# Altium PCB VCO.PcbDoc (part 1 of 2)
Units mm, origin at the board's own origin, x right, y up, seen from the top; angles counter-clockwise.
Board outline 69 x 110 mm, 2 copper layers (Top Layer, Bottom Layer); 139 components, 108 nets, 464 pads, 459 vias.
Unrouted connection lines stored in the file: 58.
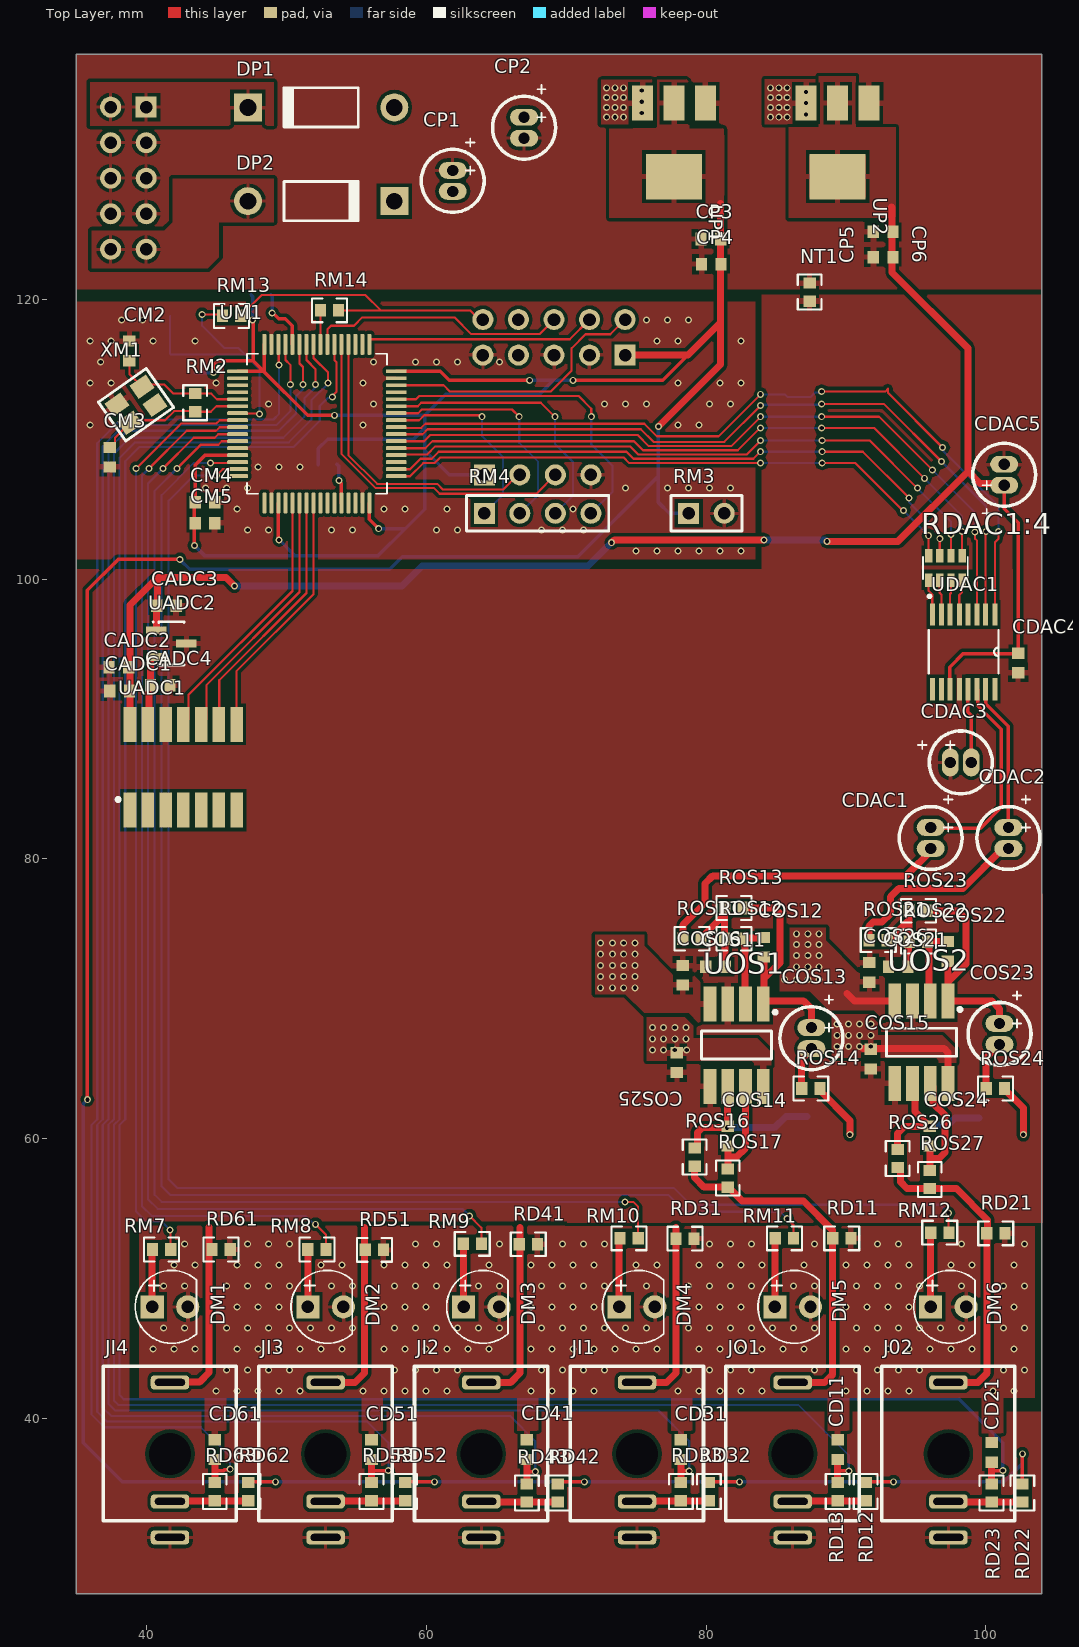
[diagram p0: Top Layer view]
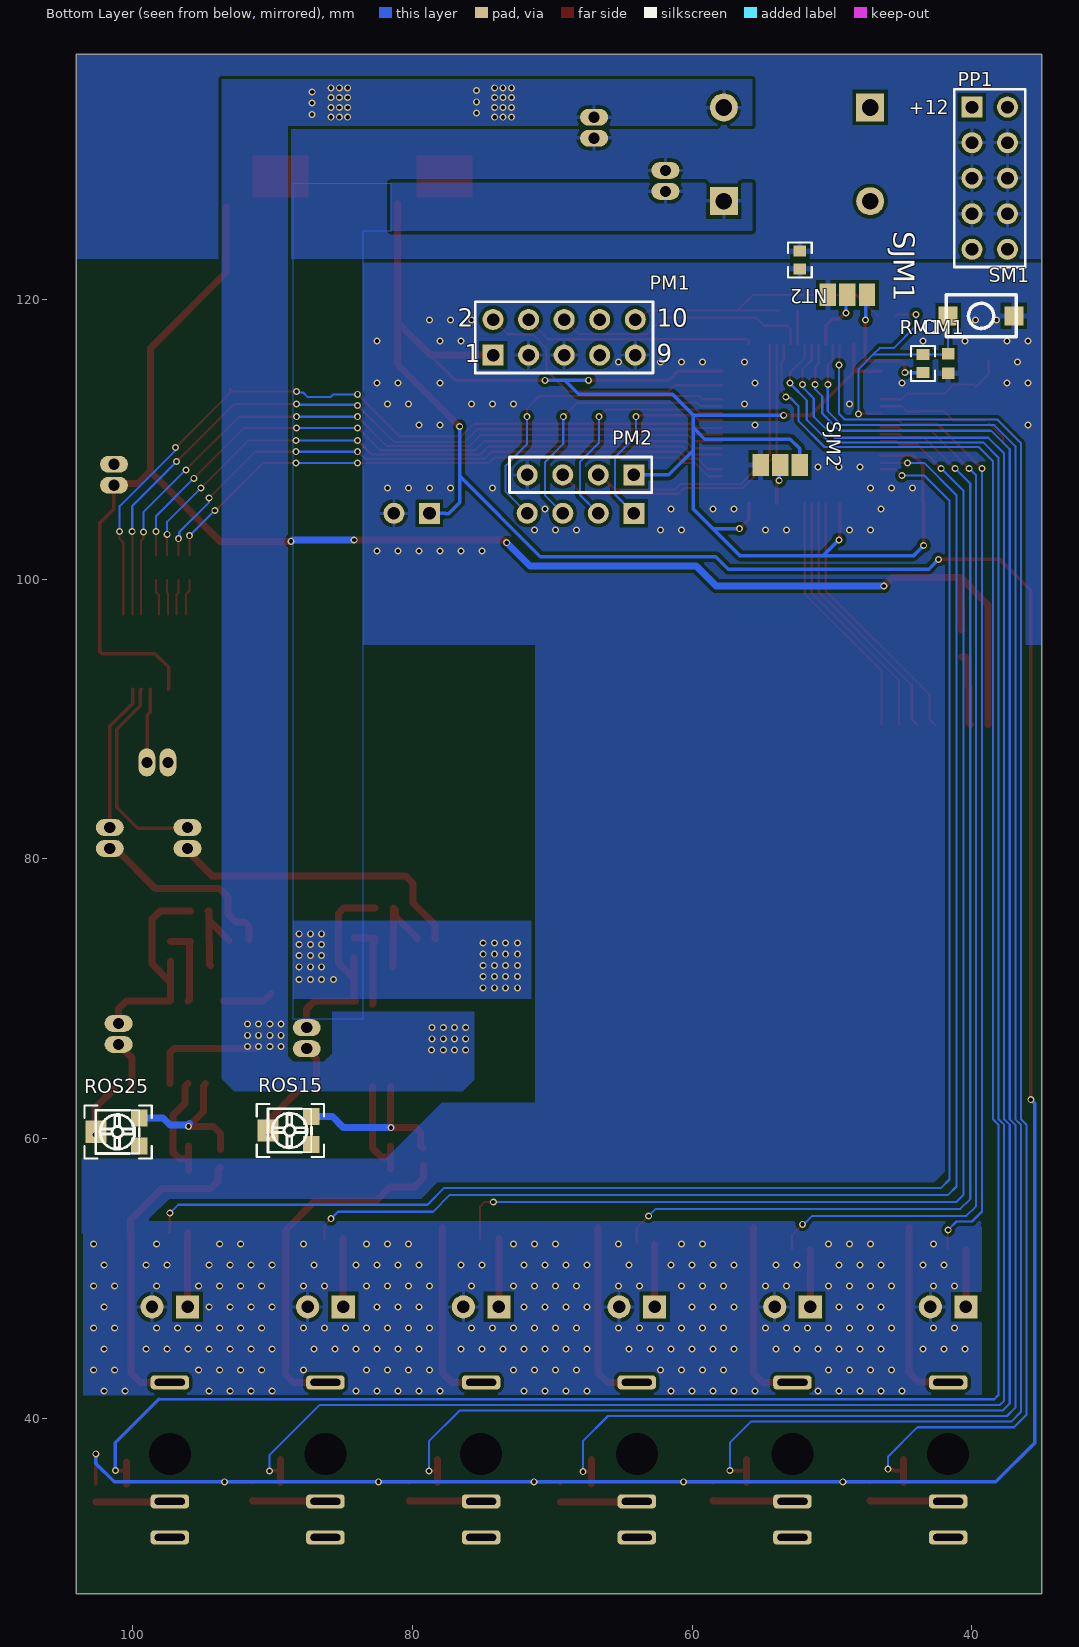
[diagram p1: Bottom Layer view, seen from below]

## Layer stack, top to bottom
Top Solder: solder mask 0.0102, Solder Resist, Dk 3.5
Top Layer: signal copper 0.0356
Dielectric 1: dielectric 0.32, FR-4, Dk 4.8
Bottom Layer: signal copper 0.0356
Bottom Solder: solder mask 0.0102, Solder Resist, Dk 3.5

## Board outline
35,27.5 104,27.5 104,137.5 35,137.5

## Design rules (kind name [scope] priority, off if disabled: settings)
Clearance Clearance_1 [InPolygon] p1: gap=0.25 ignorepadtopadclearanceinfootprint=FALSE
Clearance [All] p2: gap=0.01 ignorepadtopadclearanceinfootprint=FALSE
ComponentClearance [All] p1: gap=0 collisioncheckmode=3 verticalgap=0.254 showdistances=FALSE
PlaneConnect [All] p1: planeconnectstyle=Relief reliefexpansion=0.508 reliefentries=4 reliefconductorwidth=0.5 reliefairgap=0.125
PolygonConnect PolygonConnect_1 [All] p1: thpad.connectstyle=Relief thpad.reliefconductorwidth=0.254 thpad.reliefentries=4 thpad.polygonreliefangle="90 Angle" thpad.airgapwidth=0.254 smdpad.connectstyle=Relief smdpad.reliefconductorwidth=0.4 smdpad.reliefentries=4 smdpad.polygonreliefangle="90 Angle" smdpad.airgapwidth=0.254 via.connectstyle=Direct via.reliefconductorwidth=0.254 via.reliefentries=4 via.polygonreliefangle="90 Angle" via.airgapwidth=0.254
RoutingVias [All] p1: holewidth=0.711 width=1.27 viastyle="Through Hole" minholewidth=0.3 minwidth=0.5 maxholewidth=0.711 maxwidth=1.27
SolderMaskExpansion [All] p1: expansion=0.102
Width [All] p1: maxlimit=5 minlimit=0.152 preferedwidth=0.254
28 further rules are at their usual default settings.

## Classes and differential pairs
component class VCO_TOP: NT1 NT2
component class U_Power: CP1 CP2 CP3 CP4 CP5 CP6 DP1 DP2 PP1 UP1 UP2
component class U_Micro: CM1 CM2 CM3 CM4 CM5 DM1 DM2 DM3 DM4 DM5 DM6 PM1 PM2 RM1 RM2 RM3 RM4 RM7 RM8 RM9 RM10 RM11 RM12 RM13 RM14 SJM1 SJM2 SM1 UM1 XM1
component class U_Interfaces: CD11 CD21 CD31 CD41 CD51 CD61 J02 JI1 JI2 JI3 JI4 JO1 RD11 RD12 RD13 RD21 RD22 RD23 RD31 RD32 RD33 RD41 RD42 RD43 RD51 RD52 RD53 RD61 RD62 RD63
component class U_Input_stages: * *? CIS11 CIS21 CIS31 CIS32 CIS33 RIS11 RIS12 RIS13 RIS14 RIS21 RIS22 RIS23 RIS24 RIS31 RIS32 RIS33 RIS34 RIS35 RIS36 RIS41 RIS42 RIS43
component class U_DAC: CDAC1 CDAC2 CDAC3 CDAC4 CDAC5 RDAC1:4 UDAC1
component class U_ADC: CADC1 CADC2 CADC3 CADC4 UADC1 UADC2
component class U_Output_stages: COS11 COS12 COS13 COS14 COS15 COS16 COS21 COS22 COS23 COS24 COS25 COS26 ROS11 ROS12 ROS13 ROS14 ROS15 ROS16 ROS17 ROS21 ROS22 ROS23 ROS24 ROS25 ROS26 ROS27 UOS1 UOS2

## Components (designator, comment, footprint, x,y, rotation, side; value= is the part's Value field where it differs from the comment)
* "TL074" DIP-14 352.1,71.4 r90 top
*? "TL074" DIP-14 119.41,63.36 r90 bottom
*? "TL074" DIP-14 142.4,68.5 r90 top
CADC1 "1u" "C 0603 / 1608" 38.098,92 r180 top value=asdasd
CADC2 "10u" "C 0603 / 1608" 38.049,93.7 r180 top value=asdasd
CADC3 "0.1u" "C 0603 / 1608" 41.449,98.1 r0 top value=asdasd
CADC4 "1u" "C 0603 / 1608" 41,92.4 r0 top value=asdasd
CD11 "Cap" "C 0603 / 1608" 89.4,37.8 r270 top value=0.1u
CD21 "Cap" "C 0603 / 1608" 100.4,37.6 r270 top value=0.1u
CD31 "Cap" "C 0603 / 1608" 78.2,37.8 r270 top value=0.1u
CD41 "Cap" "C 0603 / 1608" 67.2,37.8 r270 top value=0.1u
CD51 "Cap" "C 0603 / 1608" 56.1,37.8 r270 top value=0.1u
CD61 "Cap" "C 0603 / 1608" 44.9,37.8 r270 top value=0.1u
CDAC1 "Cap Pol1" C-RAD-4.5 96.05,81.5 r270 top value=4.7-10uF
CDAC2 "Cap Pol1" C-RAD-4.5 101.6,81.5 r270 top value=4.7-10uF
CDAC3 "Cap Pol1" C-RAD-4.5 98.2,86.9 r0 top value=10uF
CDAC4 "0.1u" "C 0603 / 1608" 102.3,94 r270 top value=asdasd
CDAC5 "Cap Pol1" C-RAD-4.5 101.3,107.45 r90 top value=10uF
CIS11 "Cap" "C 0603 / 1608" 375.6,79.4 r90 top value=1n
CIS21 "Cap" "C 0603 / 1608" 323.1,79.4 r90 top value=1n
CIS31 "Cap" "C 0603 / 1608" 281.1,79.4 r90 top value=1n
CIS32 "0.1u" "C 0603 / 1608" 164.1,79.4 r90 top value=asdasd
CIS33 "0.1u" "C 0603 / 1608" 173.1,79.4 r90 top value=asdasd
CM1 "18pF" "C 0603 / 1608" 41.7,115.4 r90 bottom value=asdasd
CM2 "18pF" "C 0603 / 1608" 38.798,116.3 r270 top value=asdasd
CM3 "18pF" "C 0603 / 1608" 37.398,108.7 r90 top value=asdasd
CM4 "1u" "C 0603 / 1608" 44.2,105.5 r180 top value=asdasd
CM5 "10n" "C 0603 / 1608" 44.2,104 r180 top value=asdasd
COS11 "3.9n" "C 0603 / 1608" 80.686,72.3 r0 top value=asdasd
COS12 "1n" "C 0603 / 1608" 84.136,73.7 r270 top value=asdasd
COS13 "Cap Pol1" C-RAD-4.5 87.531,67.2 r270 top value=10u
COS14 "47p" "C 0603 / 1608" 81.551,60.2 r270 top value=asdasd
COS15 "0.1u" "C 0603 / 1608" 91.769,65.7 r90 top value=asdasd
COS16 "0.1u" "C 0603 / 1608" 78.336,71.7 r270 top value=asdasd
COS21 "3.9n" "C 0603 / 1608" 93.736,72.313 r0 top value=asdasd
COS22 "1n" "C 0603 / 1608" 97.269,73.4 r270 top value=asdasd
COS23 "Cap Pol1" C-RAD-4.5 100.969,67.5 r270 top value=10u
COS24 "47p" "C 0603 / 1608" 95.986,60.2 r270 top value=asdasd
COS25 "0.1u" "C 0603 / 1608" 77.913,65.454 r90 top value=asdasd
COS26 "0.1u" "C 0603 / 1608" 91.669,71.9 r270 top value=asdasd
CP1 "Cap Pol2" C-RAD-4.5 61.9,128.45 r270 top value=100pF
CP2 "Cap Pol2" C-RAD-4.5 66.997,132.25 r270 top value=100pF
CP3 "Cap Pol2" "C 0603 / 1608" 80.35,124.3 r180 top value=22u
CP4 "Cap" "C 0603 / 1608" 80.379,122.5 r0 top value=100n
CP5 "Cap Pol2" "C 0603 / 1608" 92.65,124.801 r180 top value=22u
CP6 "Cap" "C 0603 / 1608" 92.65,123.001 r0 top value=100n
DM1 "LED0" LED2-2.54-D5.0MM 41.7,48 r0 top
DM2 "LED0" LED2-2.54-D5.0MM 52.823,48 r0 top
DM3 "LED0" LED2-2.54-D5.0MM 63.946,48 r0 top
DM4 "LED0" LED2-2.54-D5.0MM 75.069,48 r0 top
DM5 "LED0" LED2-2.54-D5.0MM 86.192,48 r0 top
DM6 "LED0" LED2-2.54-D5.0MM 97.315,48 r0 top
DP1 "Diode" DO-41 52.5,133.7 r180 top
DP2 "Diode" DO-41 52.5,127 r0 top
J02 "PJ-301" PJ-301 97.315,37.5 r0 top locked
JI1 "PJ-301" PJ-301 75.069,37.5 r0 top locked
JI2 "PJ-301" PJ-301 63.946,37.5 r0 top locked
JI3 "PJ-301" PJ-301 52.823,37.5 r0 top locked
JI4 "PJ-301" PJ-301 41.7,37.5 r0 top locked
JO1 "PJ-301" PJ-301 86.192,37.5 r0 top locked
NT1 "Net_Tie" RES0603R 87.4,120.5 r270 top value=0
NT2 "Net_Tie" RES0603R 52.3,122.8 r270 bottom value=0
PM1 "Header 5X2" HDR2X5 74.217,116 r180 bottom
PM2 "Header 4" HDR1X4 64.155,107.445 r0 bottom
PP1 "Header 5X2" HDR2X5 40,133.72 r270 bottom locked
RD11 "Res1" RES0603R 89.7,52.9 r180 top value=10k
RD12 "Res1" RES0603R 91.4,34.8 r90 top value=100k
RD13 "Res1" RES0603R 89.4,34.8 r90 top value=49.9k
RD21 "Res1" RES0603R 100.7,53.255 r180 top value=10k
RD22 "Res1" RES0603R 102.6,34.7 r90 top value=100k
RD23 "Res1" RES0603R 100.4,34.7 r90 top value=49.9k
RD31 "Res1" RES0603R 78.5,52.877 r180 top value=10k
RD32 "Res1" RES0603R 80.2,34.8 r90 top value=100k
RD33 "Res1" RES0603R 78.2,34.8 r90 top value=49.9k
RD41 "Res1" RES0603R 67.3,52.476 r180 top value=10k
RD42 "Res1" RES0603R 69.4,34.7 r90 top value=100k
RD43 "Res1" RES0603R 67.2,34.7 r90 top value=49.9k
RD51 "Res1" RES0603R 56.3,52.07 r180 top value=10k
RD52 "Res1" RES0603R 58.5,34.8 r90 top value=100k
RD53 "Res1" RES0603R 56.1,34.8 r90 top value=49.9k
RD61 "Res1" RES0603R 45.35,52.1 r180 top value=10k
RD62 "Res1" RES0603R 47.3,34.8 r90 top value=100k
RD63 "Res1" RES0603R 44.9,34.8 r90 top value=49.9k
RDAC1:4 "742C083121JP" RESARRAY(4x0603) 97.1,100.8 r0 top
RIS11 "Res1" RES0603R 340.1,79.4 r90 top value=100k
RIS12 "Res1" RES0603R 367.6,79.4 r90 top value=41.2k
RIS13 "Res1" RES0603R 331.6,79.4 r90 top value=24.9k
RIS14 "Res1" RES0603R 359.1,79.4 r90 top value=24.9k
RIS21 "Res1" RES0603R 298.1,79.4 r90 top value=100k
RIS22 "Res1" RES0603R 314.6,79.4 r90 top value=41.2k
RIS23 "Res1" RES0603R 289.6,79.4 r90 top value=24.9k
RIS24 "Res1" RES0603R 306.1,79.4 r90 top value=24.9k
RIS31 "Res1" RES0603R 215.6,79.4 r90 top value=100k
RIS32 "Res1" RES0603R 272.6,79.4 r90 top value=41.2k
RIS33 "Res1" RES0603R 207.1,79.4 r90 top value=24.9k
RIS34 "Res1" RES0603R 246.6,79.4 r90 top value=24.9k
RIS35 "" SMD_POT_3x3mm 263.6,76.4 r0 top value=20k
RIS36 "Res1" RES0603R 255.6,79.4 r90 top value=100k
RIS41 "Res1" RES0603R 199.1,79.4 r90 top value=100k
RIS42 "Res1" RES0603R 190.6,79.4 r90 top value=1k
RIS43 "Res1" RES0603R 181.6,79.4 r90 top value=2k
RM1 "Res1" RES0603R 43.5,115.4 r90 bottom value=1K
RM2 "Res1" RES0603R 43.5,112.6 r270 top value=1K
RM3 "Header 2" HDR1X2 78.76,104.7 r0 top
RM4 "Header 4" HDR1X4 64.155,104.7 r0 top
RM7 "Res1" RES0603R 41.1,52.1 r180 top value=1K
RM8 "Res1" RES0603R 52.2,52.1 r180 top value=1K
RM9 "Res1" RES0603R 63.3,52.5 r180 top value=1K
RM10 "Res1" RES0603R 74.5,52.9 r180 top value=1K
RM11 "Res1" RES0603R 85.6,52.9 r180 top value=1K
RM12 "Res1" RES0603R 96.7,53.3 r180 top value=1K
RM13 "Res1" RES0603R 46.1,118.8 r180 top value=OPEN
RM14 "Res1" RES0603R 53.1,119.2 r180 top value=SHORT
ROS11 "" RES0603R 78.986,74.3 r0 top value=5.6k
ROS12 "" RES0603R 81.986,74.3 r0 top value=3k
ROS13 "" RES0603R 81.986,76.5 r0 top value=5.6k
ROS14 "" RES0603R 87.486,63.6 r0 top value=30k
ROS15 "" SMD_POT_3x3mm 86.5,59 r90 bottom value=20k
ROS16 "" RES0603R 79.186,58.7 r270 top value=100k
ROS17 "" RES0603R 81.553,57.2 r270 top value=1k
ROS21 "" RES0603R 92.3,74.2 r0 top value=5.6k
ROS22 "" RES0603R 95.169,74.1 r0 top value=3k
ROS23 "" RES0603R 95.169,76.3 r0 top value=5.6k
ROS24 "" RES0603R 100.669,63.6 r0 top value=30k
ROS25 "" SMD_POT_3x3mm 98.8,58.9 r90 bottom value=20k
ROS26 "" RES0603R 93.686,58.6 r270 top value=100k
ROS27 "" RES0603R 95.986,57.1 r270 top value=1k
SJM1 "2-Way Solder Jumper" SOLDERJUMPER_2WAY_OPEN_NOPASTE 48.9,120.3 r180 bottom
SJM2 "2-Way Solder Jumper" SOLDERJUMPER_2WAY_OPEN_NOPASTE 53.7,108.15 r180 bottom
SM1 "Switch" PUSH_SMD_3x4 36.85,120.3 r0 bottom
UADC1 "MCP3204-CI/SL" SOIC-14 40.749,86.6 r90 top
UADC2 "4.096 VREF" SOT-23-3 41.8,95.4 r270 top
UDAC1 "PCM1781DBQR" SOP16-63P600X175-16N 98.4,94.8 r270 top
UM1 "STM32F103RCT6" QFP64P1200X1200X160-64N 52.199,111.1 r0 top locked
UOS1 "Dual NE5532 opamp" SOIC-8 82.186,66.7 r270 top
UOS2 "Dual NE5532 opamp" SOIC-8 95.386,66.9 r270 top
UP1 "3v3 REG" "SOT-223-3 - REG" 80.95,134.754 r180 top
UP2 "5VREG" "SOT-223-3 - REG" 92.65,134.754 r180 top
XM1 "TSX-3225" TSX-3225 37.913,112.476 r35 top

## Footprints (in the part's own frame and the unit in brackets; to place one, negate y for a bottom-side part, rotate by r counter-clockwise, add the part's x,y. Pads: shape width x height; smd on the part's side, far side on the other; paste and mask are expansions set on the pad)
"C 0603 / 1608" [mm] "Capacitor 0603 / 1608 (1.6 x 0.8 mm)"
  rect 0.8x0.9 smd: 1(-0.7,0) 2(0.7,0)
  body extent -0.8,-0.4 0.8,0.4, height 0.3
C-RAD-4.5 [mm]
  oval 1.2x2 hole 0.8: 1(-0.75,0) 2(0.75,0)
  silkscreen extent -3.05,-2.25 2.25,2.25
DIP-14 [mm]
  rect 1.5x2.3 hole 1: 1(7.62,3.81) 2(5.08,3.81) 3(2.54,3.81) 4(0,3.81) 5(-2.54,3.81) 6(-5.08,3.81) 7(-7.62,3.81) 8(-7.62,-3.81) 9(-5.08,-3.81) 10(-2.54,-3.81) 11(0,-3.81) 12(2.54,-3.81) 13(5.08,-3.81) 14(7.62,-3.81)
  body extent -9.84,-3.81 9.84,4.06, height 5.33
DO-41 [mm] "Diode, Axial; Body 5.2 x 2.7 mm (LxDia. max), Lead Dia. 0.86 mm (max)"
  round 2 hole 1.2: 1(-5.23,0)
  rect 2x2 hole 1.2: 2(5.23,0)
  silkscreen extent -2.65,-1.4 2.75,1.4
HDR1X2 [mm] "Connector; Header; 2 Position"
  rect 1.5x1.5 hole 0.9: 1(0,0)
  round 1.5 hole 0.9: 2(2.54,0)
  silkscreen extent -1.27,-1.27 3.81,1.27
HDR1X4 [mm] "Connector; Header; 4 Position"
  rect 1.5x1.5 hole 0.9: 1(0,0)
  round 1.5 hole 0.9: 2(2.54,0) 3(5.08,0) 4(7.62,0)
  silkscreen extent -1.27,-1.27 8.89,1.27
HDR2X5 [mm] "Connector; Header; 5x2 Position"
  rect 1.5x1.5 hole 0.9: 1(0,0)
  round 1.5 hole 0.9: 2(0,2.54) 3(2.54,0) 4(2.54,2.54) 5(5.08,0) 6(5.08,2.54) 7(7.62,0) 8(7.62,2.54) 9(10.16,0) 10(10.16,2.54)
  silkscreen extent -1.27,-1.27 11.43,3.81
LED2-2.54-D5.0MM [mil]
  rect 65x65 hole 35: 1(-49.99,0)
  round 65 hole 35: 2(49.99,0)
  silkscreen extent -97,-103 75,103, body extent -116,-116 98,116, height 513
PJ-301 [mm]
  rrect50% 2.75x1 hole 0.5 slot 2.15 at 0 deg: 1(0,-5.975) 2(0,-3.4) 3(0,5.1)
  round 0 hole 3: 18(0,0)
  silkscreen extent -4.77,-4.77 4.75,6.25
PUSH_SMD_3x4 [mm]
  rect 1.35x1.35 smd: 1(0.15,1.5) 2(4.85,1.5)
  silkscreen extent 0,0 5,3
QFP64P1200X1200X160-64N [mm]
  rrect50% 1.49x0.28 smd: 1(-5.67,3.75) 2(-5.67,3.25) 3(-5.67,2.75) 4(-5.67,2.25) 5(-5.67,1.75) 6(-5.67,1.25) 7(-5.67,0.75) 8(-5.67,0.25) 9(-5.67,-0.25) 10(-5.67,-0.75) 11(-5.67,-1.25) 12(-5.67,-1.75) 13(-5.67,-2.25) 14(-5.67,-2.75) 15(-5.67,-3.25) 16(-5.67,-3.75) 33(5.67,-3.75) 34(5.67,-3.25) 35(5.67,-2.75) 36(5.67,-2.25) 37(5.67,-1.75) 38(5.67,-1.25) 39(5.67,-0.75) 40(5.67,-0.25) 41(5.67,0.25) 42(5.67,0.75) 43(5.67,1.25) 44(5.67,1.75) 45(5.67,2.25) 46(5.67,2.75) 47(5.67,3.25) 48(5.67,3.75)
  rrect50% 0.28x1.49 smd: 17(-3.75,-5.67) 18(-3.25,-5.67) 19(-2.75,-5.67) 20(-2.25,-5.67) 21(-1.75,-5.67) 22(-1.25,-5.67) 23(-0.75,-5.67) 24(-0.25,-5.67) 25(0.25,-5.67) 26(0.75,-5.67) 27(1.25,-5.67) 28(1.75,-5.67) 29(2.25,-5.67) 30(2.75,-5.67) 31(3.25,-5.67) 32(3.75,-5.67) 49(3.75,5.67) 50(3.25,5.67) 51(2.75,5.67) 52(2.25,5.67) 53(1.75,5.67) 54(1.25,5.67) 55(0.75,5.67) 56(0.25,5.67) 57(-0.25,5.67) 58(-0.75,5.67) 59(-1.25,5.67) 60(-1.75,5.67) 61(-2.25,5.67) 62(-2.75,5.67) 63(-3.25,5.67) 64(-3.75,5.67)
  silkscreen extent -7.1,-5 5,5
RES0603R [mm] "resistor 0603 reflow soldering"
  rect 0.8x0.9 smd: 1(-0.65,0) 2(0.65,0)
  silkscreen extent -1.25,-0.85 1.25,0.85, body extent -0.8,-0.4 0.8,0.4, height 0.45
RESARRAY(4x0603) [mm]
  rect 0.53x0.97 smd: 1(-1.2,-0.875) 2(-0.4,-0.875) 3(0.4,-0.875) 4(1.2,-0.875) 5(1.2,0.875) 6(0.4,0.875) 7(-0.4,0.875) 8(-1.2,0.875)
  silkscreen extent -1.6,-2.13 1.6,0.8
SMD_POT_3x3mm [mm] "https://ae01.alicdn.com/kf/HTB1u8VOIVXXXXaMXFXXq6xXFXXXn/202183707/HTB1u8VOIVXXXXaMXFXXq6xXFXXXn.jpg?size=54797&height=535&width=908&hash=f9182dae1c0bb9b5ef09d7fbeb165d97"
  rect 1.2x1.2 smd: 1(0.6,0.7) 3(2.6,0.7)
  rect 1.6x1.5 smd: 2(1.6,3.8)
  silkscreen extent -0.3,-0.2 3.5,4.6
SOIC-8 [mm]
  rect 2.5x0.9 smd: 1(-2.95,1.905) 2(-2.95,0.635) 3(-2.95,-0.635) 4(-2.95,-1.905) 5(2.95,-1.905) 6(2.95,-0.635) 7(2.95,0.635) 8(2.95,1.905)
  silkscreen extent -2.47,-2.5 1,2.88, body extent -3,-2.45 3,2.45, height 1.75
SOIC-14 [mm]
  rect 2.5x0.9 smd: 1(-3.113,1.905) 2(-3.113,0.635) 3(-3.113,-0.635) 4(-3.113,-1.905) 5(-3.113,-3.175) 6(-3.113,-4.445) 7(-3.113,-5.715) 8(3.013,-5.715) 9(3.013,-4.445) 10(3.013,-3.175) 11(3.013,-1.905) 12(3.013,-0.635) 13(3.013,0.635) 14(3.013,1.905)
  silkscreen extent -2.47,2.63 -2.23,2.88, body extent -3.05,-6.28 3.03,2.47, height 1.75
SOLDERJUMPER_2WAY_OPEN_NOPASTE [mil]
  rect 46x63 smd paste-31.5: 1(-55,0) 3(55,0)
  rect 46x63 smd: 2(0,0)
SOP16-63P600X175-16N [mil]
  rect 63x14 smd: 1(-105,88) 2(-105,62) 3(-105,38) 4(-105,12) 5(-105,-12) 6(-105,-38) 7(-105,-62) 8(-105,-88) 9(105,-88) 10(105,-62) 11(105,-38) 12(105,-12) 13(105,12) 14(105,38) 15(105,62) 16(105,88)
  silkscreen extent -61,-98 61,98
SOT-23-3 [mm]
  rect 0.55x1.45 smd: 1(-0.95,-1.075) 2(0.965,-1.067) 3(0,1.067)
  silkscreen extent -1.57,-1.35 1.55,0.9, body extent -1.49,-1.32 1.51,1.28, height 1.1
"SOT-223-3 - REG" [mm]
  rect 1.5x2.5 smd: 1(1,0.75) 2(3.25,0.75) 3(5.5,0.75)
  rect 4x3.25 smd: 2(3.25,6)
  Top Layer region: 1.25,4.5 5.25,4.5 5.25,7.5 1.25,7.5
  body extent -0.1,-0.22 6.6,7.08, height 1.8
TSX-3225 [mm]
  rect 1.4x1.15 smd: 1(0,-1.6) 2(2.2,-1.6) 3(2.2,0) 4(0,0)
  silkscreen extent -1,-2.5 3.2,0.9

## Part data
CADC1 CADC2 CADC3 CADC4 CDAC4 CIS32 CIS33 CM1 CM2 CM3 CM4 CM5 COS11 COS12 COS14 COS15 COS16 COS21 COS22 COS24 COS25 COS26: library part Capacitor
CD11 CD21 CD31 CD41 CD51 CD61 CIS11 CIS21 CIS31 CP4 CP6: "Capacitor", LatestRevisionDate=17-Jul-2002, LatestRevisionNote="Re-released for DXP Platform.", PackageDescription="Radial Cap, Thru-Hole; 2 Leads; 0.3 in Pin Spacing", PackageReference=RAD-0.3, Published=8-Jun-2000, Publisher="Altium Limited"
CDAC1 CDAC2 CDAC3 CDAC5 COS13 COS23: "Polarized Capacitor (Radial)", LatestRevisionDate=17-Jul-2002, LatestRevisionNote="Re-released for DXP Platform.", PackageDescription="Polarized Capacitor (Radial); 2 Leads", PackageReference=RB7.6-15, Published=8-Jun-2000, Publisher="Altium Limited"
CP1 CP2 CP3 CP5: "Polarized Capacitor (Axial)", LatestRevisionDate=17-Jul-2002, LatestRevisionNote="Re-released for DXP Platform.", PackageDescription="Polarized Capacitor; 2 Leads", PackageReference=POLAR0.8, Published=8-Jun-2000, Publisher="Altium Limited"
DM1 DM2 DM3 DM4 DM5 DM6: "Typical INFRARED GaAs LED", LatestRevisionDate=08-Jul-2005, LatestRevisionNote="Mech Layer 1 removed.", PackageDescription="LED; 2 Leads", PackageReference=LED-0, Published=8-Jun-2000, Publisher="Altium Limited"
J02 JI1 JI2 JI3 JI4 JO1: "https://www.snapeda.com/parts/PJ-301BM/Tayda%20Electronics/datasheet/ /  / https://pt.aliexpress.com/item/32841677168.html?spm=a2g03.12057483.0.0.6dda4aeaXiyjRe /  / https://lh3.googleusercontent.com/proxy/ZbPfZslDxdj8iWSgzh0kYZVEID9Zfc6SS9ZRHYvUB6heg4eTAyEEOQEiXlT2FamGh3ujXXQ57fTjbGyEKtdVl3hemL66LOj7ZA"
NT1 NT2 ROS11 ROS12 ROS13 ROS14 ROS16 ROS17 ROS21 ROS22 ROS23 ROS24 ROS26 ROS27: library part Res1, "Resistor", LatestRevisionDate=17-Jul-2002, LatestRevisionNote="Re-released for DXP Platform.", PackageDescription="Axial Device, Thru-Hole; 2 Leads; 0.3 in Pin Spacing", PackageReference=AXIAL-0.3, Published=8-Jun-2000, Publisher="Altium Limited"
PM1 PP1: "Header, 5-Pin, Dual row", LatestRevisionDate=17-Jul-2002, LatestRevisionNote="Re-released for DXP Platform.", Publisher="Altium Limited"
PM2 RM4: "Header, 4-Pin", LatestRevisionDate=17-Jul-2002, LatestRevisionNote="Re-released for DXP Platform.", Publisher="Altium Limited"
RD11 RD12 RD13 RD21 RD22 RD23 RD31 RD32 RD33 RD41 RD42 RD43 RD51 RD52 RD53 RD61 RD62 RD63 RIS11 RIS12 RIS13 RIS14 RIS21 RIS22 RIS23 RIS24 RIS31 RIS32 RIS33 RIS34 RIS36 RIS41 RIS42 RIS43 RM1 RM2 RM7 RM8 RM9 RM10 RM11 RM12 RM13 RM14: "Resistor", LatestRevisionDate=17-Jul-2002, LatestRevisionNote="Re-released for DXP Platform.", PackageDescription="Axial Device, Thru-Hole; 2 Leads; 0.3 in Pin Spacing", PackageReference=AXIAL-0.3, Published=8-Jun-2000, Publisher="Altium Limited"
RDAC1:4: library part "Resistor Array 4x", "Res Thick Film Array 120 Ohm 5% 1/4W ±200ppm/°C ISOL Molded 8-Pin 1206_4 X 0603_ Concave SMD Paper T/R", Package="1206 CTS Components", Availability=Unavailable, MF="CTS Resistor", MP=742C083121JP, Price=None, SnapEDA_Link=https://www.snapeda.com/parts/742C083121JP/CTS%20Resistor%20Products/view-part/?ref=snap
RIS35 ROS15 ROS25: library part RPot, "Potentiometer", LatestRevisionDate=17-Jul-2002, LatestRevisionNote="Re-released for DXP Platform.", PackageDescription="Variable Resistor, Thru-Hole; 3 Leads", PackageReference=VR5, Published=8-Jun-2000, Publisher="Altium Limited", Set Position=0.5, Sim Note="Enter the Resistance value and the set point into parameter fields."
RM3: "Header, 2-Pin", LatestRevisionDate=17-Jul-2002, LatestRevisionNote="Re-released for DXP Platform.", Publisher="Altium Limited"
SJM1 SJM2: library part SOLDERJUMPER_2WAY0603
SM1: library part B3U-1000P, Manufacturer=Omron, DIGIKEY=SW1020CT-ND, MPN=B3U-1000P
UADC1: "12 Bit Analog to Digital Converter 2, 4 Input 1 SAR 14-SOIC", Package="SOIC-14 Microchip", Availability=Unavailable, MF=Microchip, MP=MCP3204-CI/SL, Price=None, SnapEDA_Link=https://www.snapeda.com/parts/MCP3204-CI/SL/Microchip/view-part/62/?ref=snap
UADC2: library part MCP1541, "4.096 Voltage reference"
UDAC1: "Converters - Digital to Analog _DAC_ 24-Bit, 192kHz, Ster Delta-Sig Audio DAC", Package="SSOP-16 Texas Instruments", Availability=Unavailable, MF="Texas Instruments", MP=PCM1781DBQR, Price=None, SnapEDA_Link=https://www.snapeda.com/parts/PCM1781DBQR/Texas%20Instruments/view-part/547789/?ref=snap
UM1: "ARM® Cortex®-M3 STM32F1 Microcontroller IC 32-Bit 72MHz 256KB _256K x 8_ FLASH", Package="LQFP-64 STMicroelectronics", Availability=Unavailable, MF=STMicroelectronics, MP=STM32F103RCT6, Price=None, SnapEDA_Link=https://www.snapeda.com/parts/STM32F103RCT6/STMicroelectronics/view-part/44152/?ref=snap
UOS1 UOS2: library part NE5532
UP1 UP2: library part AMS1117, "LDO 3.3V/5V/12V"
XM1: "16MHz ±10ppm Crystal 9pF 60 Ohms 4-SMD, No Lead", Package="SMD-4 Epson", Availability=Unavailable, MF=EPSON, MP=TSX-3225, Price=None, SnapEDA_Link=https://www.snapeda.com/parts/TSX-3225/EPSON/view-part/557780/?ref=snap

## Via types
v1: diameter 0.5, hole 0.3, Top Layer to Bottom Layer, 459 vias

## Nets (pads, with @x,y where several pads share a name; then routed paths per layer and width w, separated by ;. In a path a pad name is that pad's centre, name@x,y a point inside that pad or via, vN(x,y) a via of type N, cw(c..) or ccw(c..) an arc to the next point about the centre after c; other vN are vias at no path point)
3V3: CM4.2 CM5.2 CP3.1 CP4.2 PM1.1 PM2.1 RD12.2 RD22.2 RD32.2 RD42.2 RD52.2 RD62.2 RM1.1 RM3.1 SJM1.3 SJM2.3 UM1.1 UM1.13 UM1.19 UM1.32 UM1.48 UM1.64 UP1.2 | length 337.1
  Top Layer w0.25: v1(35.8,62.8) 35.8,99.2 38,101.4 v1(42.4,101.4) ; v1(43.45,102.4) 43.45,105.45 CM4.2 43.5,108.15 44.2,108.85 UM1.13 ; v1(44.8,114.75) 44.8,115.3 45.1,115.6 47.634,115.6 ; UM1.1 48.384,114.85 ; RD62.2 47.35,35.5 v1(49.23,35.5) ; v1(47.6,118.5) 47.634,118.466 47.634,115.6 ; UM1.64 48.449,114.915 48.384,114.85 ; v1@49.449,102.8 UM1.19 ; v1(53.449,111.7) 51.534,111.7 48.384,114.85 ; UM1.32 55.949,104.283 v1@56.624,103.608 ; UM1.48 61,114.85 61.65,114.2 v1(67.4,114.2) ; RD52.2 58.55,35.5 v1(60.6,35.5) ; RD42.2 69.55,35.5 v1(71.3,35.5) ; v1(70.5,114.2) 76.9,114.2 78.7,116 ; RD32.2 80.25,35.5 v1(82.4,35.5) ; RD12.2 91.45,35.5 v1(93.4,35.5) ; RD22.2 v1(102.6,37.5) ; 47.634,115.6 48.384,114.85
  Top Layer w0.5: PM1.1 78.7,116 81.031,118.331 ; v1(76.6,110.9) 81.031,115.331 81.031,118.331 ; 81.031,126.843 81.031,118.331
  Bottom Layer w0.25: v1(35.8,62.8) 35.5,62.5 35.5,38.3 38.3,35.5 v1(49.23,35.5) v1(60.6,35.5) v1(71.3,35.5) v1(82.4,35.5) v1(93.4,35.5) 101.29,35.5 102.6,36.81 v1(102.6,37.5) ; v1(42.4,101.4) 43.1,100.7 57.4,100.7 58.3,101.6 70.838,101.6 76.6,107.362 ; v1(43.45,102.4) 44.199,101.651 50.649,101.651 ; RM1.1 v1(44.8,114.75) ; SJM1.3 47.6,120.203 v1(47.6,118.5) ; v1(49.5,102.8) 50.649,101.651 ; SJM2.3 52.303,109.325 52.978,110 59.1,110 59.9,110.8 ; v1(53.449,111.7) 59.9,111.7 ; v1(56.616,103.6) 58.5,103.6 ; PM2.1 61.655,107.445 59.9,109.2 ; v1(67.4,114.2) 69.1,114.2 ; v1(70.5,114.2) 69.1,114.2 ; v1(76.6,110.9) 76.6,107.362 ; RM3.1 77.627,104.7 77.604,104.677 77.396,104.677 76.6,105.473 76.6,107.362 ; 50.649,101.651 56.551,101.651 58.5,103.6 ; 58.5,103.6 59.9,105 59.9,109.2 ; 59.9,109.2 59.9,110.8 ; 59.9,110.8 59.9,111.7 ; 59.9,111.7 61.4,113.2 68.1,113.2 69.1,114.2
+5: CADC1.1 CADC2.1 CADC3.1 CDAC4.1 CDAC5.1 CP5.1 CP6.2 RIS35.2 UADC1.14 UADC2.1 UDAC1.11 UP2.2 | length 120.1
  Top Layer w0.25: UDAC1.11 97.4,92.168 97.4,93.7 98.379,94.679 102.179,94.679 102.3,94.8 102.3,104.017 101.3,105.017 CDAC5.1
  Top Layer w0.5: UADC1.14 38.844,98.144 40.8,100.1 ; UADC2.1 40.737,96.362 40.737,98.088 CADC3.1 40.8,98.151 40.8,100.1 ; v1(46.3,99.5) 45.7,100.1 40.8,100.1 ; v1(73.243,102.6) 73.443,102.8 v1(84.136,102.8) ; v1(88.645,102.7) 93.724,102.7 98.706,107.682 98.706,107.7 ; 93.25,126.6 93.3,126.55 93.3,121.9 98.706,116.494 98.706,107.7 ; CDAC5.1 101.166,106.834 99.572,106.834 98.706,107.7
  Bottom Layer w0.5: v1(46.3,99.5) 58.271,99.5 59.7,100.929 71.572,100.929 v1(73.243,102.6) ; v1(84.136,102.8) 88.545,102.8 v1(88.645,102.7)
+12: *.4 CIS32.2 COS15.2 COS25.2 CP2.1 DP1.1 UOS1.8 UOS2.8 UP1.3 UP2.3 | length 8.4
  Top Layer w0.5: 91.219,66.45 97.019,66.45 97.291,66.178 UOS2.8
  other v1: 76.169,66.354 76.969,66.354 77.769,66.354 78.617,66.354 89.369,66.6 90.169,66.6 90.969,66.6 91.769,66.6 76.169,67.154 76.969,67.154 77.769,67.154 78.569,67.154 89.369,67.4 90.169,67.4 90.969,67.4 91.769,67.4 76.169,67.954 76.969,67.954 77.769,67.954 78.569,67.954 89.369,68.2 90.169,68.2 90.969,68.2 91.769,68.2 72.9,133 73.5,133 74.101,133 84.6,133 85.2,133 85.801,133 87.15,133.2 75.4,133.3 72.9,133.7 73.5,133.7 74.101,133.7 84.6,133.7 85.2,133.7 85.801,133.7 87.15,134.004 75.4,134.1 72.9,134.4 73.5,134.4 74.101,134.4 84.6,134.4 85.2,134.4 85.801,134.4 87.141,134.8 75.4,134.9 72.9,135.1 73.5,135.1 74.101,135.1 84.6,135.1 85.2,135.1 85.801,135.1
-12: *.11 CIS33.2 COS16.2 COS26.2 CP1.2 DP2.2 UOS1.4 UOS2.4 | length 3.6
  Top Layer w0.5: 90.069,70.4 90.619,69.85 91.569,69.85 UOS2.4
  other v1: 72.469,70.8 73.319,70.8 74.119,70.8 74.919,70.8 85.619,71.4 86.469,71.4 87.269,71.4 88.069,71.4 72.469,71.6 73.319,71.6 74.119,71.6 74.919,71.6 86.469,72.3 87.269,72.3 88.069,72.3 72.469,72.4 73.319,72.4 74.119,72.4 74.919,72.4 86.469,73.1 87.269,73.1 88.069,73.1 72.469,73.2 73.319,73.2 74.119,73.2 74.919,73.2 86.469,73.9 87.269,73.9 88.069,73.9 72.469,73.999 73.319,73.999 74.119,73.999 74.919,73.999 86.469,74.655 87.269,74.655 88.069,74.655
ADC_CLK: UADC1.11 UM1.21 | length 19
  Top Layer w0.152: UADC1.11 43.028,89.987 43.028,91.728 50.449,99.149 UM1.21
ADC_CS: UADC1.8 UM1.24 | length 18.1
  Top Layer w0.152: UADC1.8 46.464,93.442 51.949,98.927 UM1.24
ADC_MISO: UADC1.10 UM1.22 | length 18.7
  Top Layer w0.152: UADC1.10 44.298,89.987 44.298,92.424 50.949,99.075 UM1.22
ADC_MOSI: UADC1.9 UM1.23 | length 18.4
  Top Layer w0.152: UADC1.9 45.224,89.643 45.224,92.776 51.449,99.001 UM1.23
AGND: *.3 *.5 *.9 *.13 *?.3@138.59,71.04 *?.5@123.22,60.82 CADC1.2 CADC2.2 CADC3.2 CADC4.2 CDAC3.1 CDAC4.2 CDAC5.2 CIS32.1 CIS33.1 COS11.1 COS15.1 COS16.1 COS21.1 COS25.1 COS26.1 J02.1 JI1.1 JI2.1 JI3.1 JI4.1 JO1.1 NT1.2 RIS35.1 RIS43.1 UADC1.12 UADC2.3 UDAC1.12 UOS1.3 UOS1.5 UOS2.3 UOS2.5
AUDIO_OUT_1: JO1.3 RD11.2 ROS16.2 ROS17.2 | length 25.6
  Top Layer w0.5: ROS16.2@79.186,58.12 ROS16.2 79.186,57.23 79.866,56.55 ROS17.2@81.549,56.55 ; ROS17.2 81.603,56.55 82.587,55.566 86.953,55.566 89.019,53.5 89.019,53.052 RD11.2@88.967,53 ; JO1.3 88.475,42.6 89.05,43.175 RD11.2
AUDIO_OUT_1_SWITCH: CD11.2 RD13.2 UM1.57 | length 146.4
  Top Layer w0.152: UM1.57 51.959,116.76 51.959,115.797 53,114.756 v1(53,114)
  Top Layer w0.25: 89.4,36.3 90.175,36.3 v1(90.2,36.275)
  Top Layer w0.5: RD13.2 89.4,36.3 CD11.2
  Bottom Layer w0.152: v1(53,114) 52.929,113.929 52.929,113.896 51.8,112.767 51.8,111.371 50.197,109.768 39.197,109.768 38.1,108.671 38.1,61.4 37.7,61 37.7,41.3 38,41 86.6,41 90.2,37.4 v1(90.2,36.275)
AUDIO_OUT_2: J02.3 RD21.2 ROS26.2 ROS27.2 | length 22.5
  Top Layer w0.5: ROS26.2 93.736,57.95 93.886,57.8 93.886,56.936 94.372,56.45 ROS27.2 97.886,56.45 100.119,54.217 100.119,53.364 100.05,53.295 100.09,53.255 100.09,43.275 99.415,42.6 J02.3
AUDIO_OUT_2_SWITCH: CD21.2 RD23.2 UM1.54 | length 157
  Top Layer w0.152: v1(53.3,113) 53.3,113.076 53.6,113.376 53.6,115.5 53.449,115.651 UM1.54
  Top Layer w0.25: 100.4,36.3 v1(101.2,36.3)
  Top Layer w0.5: RD23.2 100.4,36.3 CD21.2
  Bottom Layer w0.152: v1(53.3,113) 53.233,112.933 52.966,112.933 52.4,112.368 52.4,111.3 50.535,109.435 39.505,109.435 38.5,108.43 38.5,61.4 38.1,61 38.1,41.7 38.4,41.4 98.1,41.4
  Bottom Layer w0.25: 98.1,41.4 101.2,38.3 v1(101.2,36.3)
BOOT0: SJM1.2 UM1.60 | length 4.5
  Top Layer w0.25: v1(49,119) 49.068,119 49.468,118.6 49.949,118.6 50.449,118.1 UM1.60
  Bottom Layer w0.25: SJM1.2 49,120.2 v1(49,119)
BOOT1: SJM2.2 UM1.28 | length 2.9
  Top Layer w0.25: v1(53.771,107.032) 53.949,106.854 UM1.28
  Bottom Layer w0.25: SJM2.2@53.629,108.221 SJM2.2 53.771,108.079 v1(53.771,107.032)
DAC_CLK: RDAC1:4.5 UM1.37 | length 47
  Top Layer w0.152: UM1.37 59.95,109.35 60.45,109.85 74.85,109.85 75.5,109.2 82.27,109.2 83.87,110.8 v1(83.9,110.8) ; v1(88.264,110.8) 92,110.8 v1(95.6,107.2) ; RDAC1:4.5 v1(98.3,103.4)
  Bottom Layer w0.152: v1(83.9,110.8) v1(88.264,110.8) ; v1(95.6,107.2) 98.3,104.5 v1(98.3,103.4)
DAC_CLK_IC: RDAC1:4.4 UDAC1.5 | length 2.5
  Top Layer w0.152: UDAC1.5 98.095,98.864 98.3,99.069 RDAC1:4.4
DAC_DEMP0: UDAC1.2 UM1.39 | length 54.5
  Top Layer w0.152: UM1.39 59.75,110.35 60.1,110.7 75.345,110.7 76.245,109.8 81.3,109.8 v1(83.9,112.4) ; v1(88.264,112.5) 92.725,112.5 v1(96.825,108.4) ; UDAC1.2 99.975,103.375 v1(100,103.4)
  Bottom Layer w0.152: v1(83.9,112.4) 83.95,112.45 88.214,112.45 v1(88.264,112.5) ; v1(96.825,108.4) 100,105.225 v1(100,103.4)
DAC_DEMP1: UDAC1.3 UM1.38 | length 52.9
  Top Layer w0.152: UM1.38 59.85,109.85 60.28,110.28 75.139,110.28 75.919,109.5 81.8,109.5 v1(83.9,111.6) ; v1(88.264,111.6) 92.365,111.6 v1(96.165,107.8) ; v1(99.2,103.364) 99.214,103.35 99.214,102.886 99.365,102.735 UDAC1.3
  Bottom Layer w0.152: v1(83.9,111.6) v1(88.264,111.6) ; v1(96.165,107.8) 99.2,104.765 v1(99.2,103.364)
DAC_FORMAT: UDAC1.1 UM1.40 | length 56.7
  Top Layer w0.152: UM1.40 57.919,110.8 59.65,110.8 59.95,111.1 75.585,111.1 76.485,110.2 80.9,110.2 v1(83.9,113.2) ; v1(88.264,113.395) 92.795,113.395 93,113.6 93,113.301 v1(96.9,109.401) ; UDAC1.1 100.635,102.613 100.9,102.878 v1(100.9,103.4)
  Bottom Layer w0.152: v1(83.9,113.2) 85.628,113.2 85.828,113 87.462,113 87.79,113.329 88.197,113.329 v1(88.264,113.395) ; v1(96.9,109.401) 96.9,109.2 100.9,105.2 v1(100.9,103.4)
DAC_MUTE: UDAC1.4
DGND: CD11.1 CD21.1 CD31.1 CD41.1 CD51.1 CD61.1 CM1.1 CM2.1 CM3.1 CM4.1 CM5.1 DM1.2 DM2.2 DM3.2 DM4.2 DM5.2 DM6.2 NT2.2 PM1.3 PM1.5 PM1.9 PM2.4 RD11.1 RD21.1 RD31.1 RD41.1 RD51.1 RD61.1 RM3.2 SJM1.1 SJM2.1 SM1.1 UADC1.7 UM1.12 UM1.18 UM1.31 UM1.47 UM1.63 XM1.2 XM1.4
  other v1: 45,42 46.5,42 48,42 49.5,42 51,42 55.5,42 57,42 58.5,42 60,42 61.5,42 67.5,42 69,42 70.5,42 72,42 78,42 79.5,42 81,42 82.5,42 84,42 90,42 91.5,42 93,42 94.5,42 100.5,42 102,42 45.75,43.5 47.25,43.5 48.75,43.5 50.25,43.5 57.75,43.5 59.25,43.5 60.75,43.5 62.25,43.5 68.25,43.5 69.75,43.5 71.25,43.5 72.75,43.5 78.75,43.5 80.25,43.5 81.75,43.5 83.25,43.5 87.75,43.5 90.75,43.5 92.25,43.5 93.75,43.5 95.25,43.5 101.25,43.5 102.75,43.5 40.5,45 42,45 43.5,45 46.5,45 48,45 49.5,45 51,45 52.5,45 54,45 57,45 58.5,45 60,45 61.5,45 63,45 64.5,45 67.5,45 69,45 70.5,45 72,45 73.5,45 75,45 76.5,45 79.5,45 81,45 82.5,45 84,45 85.5,45 87,45 90,45 91.5,45 93,45 94.5,45 96,45 97.5,45 99,45 102,45 41.25,46.5 42.75,46.5 45.75,46.5 47.25,46.5 48.75,46.5 50.25,46.5 51.75,46.5 53.25,46.5 54.75,46.5 57.75,46.5 59.25,46.5 60.75,46.5 62.25,46.5 63.75,46.5 65.25,46.5 68.25,46.5 69.75,46.5 71.25,46.5 72.75,46.5 74.25,46.5 75.75,46.5 78.75,46.5 80.25,46.5 81.75,46.5 83.25,46.5 84.75,46.5 86.25,46.5 87.75,46.5 90.75,46.5 92.25,46.5 93.75,46.5 95.25,46.5 96.75,46.5 98.25,46.5 101.25,46.5 102.75,46.5 46.5,48 48,48 49.5,48 57,48 58.5,48 60,48 67.5,48 69,48 70.5,48 72,48 79.5,48 81,48 82.5,48 90,48 91.5,48 93,48 94.5,48 102,48 41.25,49.5 42.75,49.5 45.75,49.5 47.25,49.5 48.75,49.5 50.25,49.5 53.25,49.5 54.75,49.5 57.75,49.5 59.25,49.5 60.75,49.5 63.75,49.5 65.25,49.5 68.25,49.5 69.75,49.5 71.25,49.5 72.75,49.5 75.75,49.5 78.75,49.5 80.25,49.5 81.75,49.5 83.25,49.5 86.25,49.5 87.75,49.5 90.75,49.5 92.25,49.5 93.75,49.5 95.25,49.5 98.25,49.5 101.25,49.5 102.75,49.5 42,51 43.5,51 46.5,51 48,51 49.5,51 52.5,51 54,51 57,51 58.5,51 60,51 61.5,51 64.5,51 67.5,51 69,51 70.5,51 72,51 75,51 76.5,51 79.5,51 81,51 82.5,51 84,51 87,51 90,51 91.5,51 93,51 94.5,51 97.5,51 99,51 102,51 42.75,52.5 47.25,52.5 48.75,52.5 50.25,52.5 59.25,52.5 60.75,52.5 65.25,52.5 69.75,52.5 71.25,52.5 72.75,52.5 80.25,52.5 81.75,52.5 83.25,52.5 87.75,52.5 92.25,52.5 93.75,52.5 98.25,52.5 102.75,52.5 75,102 76.5,102 78,102 79.5,102 81,102 82.5,102 47.25,103.5 48.75,103.5 53.25,103.5 54.75,103.5 60.75,103.5 62.25,103.5 68.25,103.5 69.75,103.5 71.25,103.5 46.5,105 57,105 58.5,105 61.5,105 70.5,105 44.25,106.5 45.75,106.5 47.25,106.5 74.25,106.5 77.25,106.5 78.75,106.5 80.25,106.5 81.75,106.5 48,108 49.5,108 51,108 36,111 55.5,111 78,111 79.5,111 48.75,112.5 56.25,112.5 72.75,112.5 74.25,112.5 75.75,112.5 80.25,112.5 81.75,112.5 36,114 37.5,114 45,114 55.5,114 78,114 81,114 82.5,114 36.75,115.5 56.25,115.5 59.25,115.5 60.75,115.5 62.25,115.5 65.25,115.5 36,117 37.5,117 40.5,117 43.5,117 76.5,117 78,117 82.5,117 38.25,118.5 39.75,118.5 75.75,118.5 77.25,118.5 78.75,118.5
FM_CV: JI2.3 RD41.2 RIS31.1 | length 13.5
  Top Layer w0.5: JI2.3 66.046,42.6 66.721,43.275 66.721,53.675
FM_CV_OUT: *?.7@123.22,55.74 CIS31.2 RIS34.2 UADC1.2
FM_CV_SWITCH: CD41.2 RD43.2 UM1.59 | length 124.8
  Top Layer w0.152: UM1.59 50.949,115.4 51.2,115.149 v1(51.2,113.9)
  Top Layer w0.25: 67.2,36.225 v1(67.8,36.225)
  Top Layer w0.5: RD43.2 67.2,36.225 CD41.2
  Bottom Layer w0.152: v1(51.2,113.9) 51.2,113.553 50.7,113.053 50.7,111.829 49.471,110.6 38.629,110.6 37.3,109.271 37.3,61.4 36.9,61 36.9,40.8 37.5,40.2 66,40.2 67.8,38.4 v1(67.8,36.225)
GATE_IN: JI4.3 RD61.2 RIS41.1 | length 13.5
  Top Layer w0.5: JI4.3 41.725,42.625 43.825,42.625 44.5,43.3 44.5,53.7
GATE_IN_OUT: RIS42.1 RIS43.2 UADC1.4
GATE_IN_SWITCH: CD61.2 RD63.2 UM1.62 | length 103.3
  Top Layer w0.152: UM1.62 49.475,116.745 49.475,115.325 v1(49.5,115.3)
  Top Layer w0.25: 44.9,36.275 45.5,36.275 45.577,36.352 45.952,36.352 v1(46,36.4)
  Top Layer w0.5: RD63.2 44.9,36.275 CD61.2
  Bottom Layer w0.152: v1(46,36.4) 46,37.3 43.9,39.4 37,39.4 36.1,40.3 36.1,61 36.5,61.4 36.5,109.7 38.2,111.4 49.1,111.4 49.5,111.8 v1(49.5,115.3)
GND: CP1.1 CP2.2 CP3.2 CP4.1 CP5.2 CP6.1 NT1.1 NT2.1 PP1.3 PP1.4 PP1.5 PP1.6 PP1.7 PP1.8 UP1.1 UP2.1
I2S2_CK: RDAC1:4.7 UM1.34 | length 44
  Top Layer w0.152: UM1.34 58.85,107.85 59.6,108.6 60.4,108.6 60.9,109.1 74.319,109.1 74.819,108.6 83.37,108.6 83.87,109.1 v1(83.9,109.1) ; v1(88.3,109.1) 91.2,109.1 v1(94.5,105.8) ; RDAC1:4.7 v1(96.7,102.886)
  Bottom Layer w0.152: v1(83.9,109.1) v1(88.3,109.1) ; v1(94.5,105.8) 94.5,105.5 96.636,103.364 96.636,102.95 v1(96.7,102.886)
I2S2_CK_IC: RDAC1:4.2 UDAC1.7 | length 2.5
  Top Layer w0.152: RDAC1:4.2 96.7,99 96.825,98.875 UDAC1.7
I2S2_SD: RDAC1:4.6 UM1.36 | length 45.4
  Top Layer w0.152: UM1.36 57.919,108.9 60.083,108.9 60.665,109.483 74.563,109.483 75.146,108.9 82.9,108.9 v1(83.9,109.9) ; v1(88.3,109.9) 91.7,109.9 v1(95.1,106.5) ; RDAC1:4.6 v1(97.5,103.2)
  Bottom Layer w0.152: v1(83.9,109.9) v1(88.3,109.9) ; v1(95.1,106.5) 97.5,104.1 v1(97.5,103.2)
I2S2_SD_IC: RDAC1:4.3 UDAC1.6 | length 2.5
  Top Layer w0.152: UDAC1.6 97.435,98.935 97.5,99 RDAC1:4.3
I2S2_WS: RDAC1:4.8 UM1.33 | length 42.3
  Top Layer w0.152: UM1.33 58.85,107.35 59.783,108.283 60.6,108.283 61,108.683 74.117,108.683 74.517,108.283 83.883,108.283 v1(83.9,108.3) ; v1(88.3,108.3) 90.647,108.3 94.047,104.9 v1(94.1,104.9) ; RDAC1:4.8 v1(95.9,103.1)
  Bottom Layer w0.152: v1(83.9,108.3) v1(88.3,108.3) ; v1(94.1,104.9) v1(95.9,103.1)
I2S2_WS_IC: RDAC1:4.1 UDAC1.8 | length 2.6
  Top Layer w0.152: RDAC1:4.1 95.9,99.169 96.165,98.904 UDAC1.8
IN3: JI3.3 RD51.2 RIS21.1 | length 14.4
  Top Layer w0.5: JI3.3@53.698,42.85 53.448,42.6 JI3.3 54.923,42.6 55.598,43.275 55.598,53.675
IN3_SWITCH: CD51.2 RD53.2 UM1.61 | length 115.1
  Top Layer w0.152: UM1.61 49.949,115.651 50.3,115.3 v1(50.3,113.9)
  Top Layer w0.25: 56.1,36.275 57.275,36.275 v1(57.3,36.3)
  Top Layer w0.5: RD53.2 56.1,36.275 CD51.2
  Bottom Layer w0.152: v1(50.3,113.9) 50.3,112 49.3,111 38.4,111 36.9,109.5 36.9,61.4 36.5,61 36.5,40.5 37.2,39.8 55.8,39.8 57.3,38.3 v1(57.3,36.3)
JTAG_RST: RM14.2 UM1.56 | length 2.4
  Top Layer w0.152: UM1.56 RM14.2@52.449,119.199
JTAG_TCK-SWCLK: PM1.4 UM1.49 | length 16.6
  Top Layer w0.152: UM1.49 55.949,117.074 56.013,117.138 70.275,117.138 PM1.4
JTAG_TDI: UM1.50
JTAG_TDO-TRACESWO: PM1.6 UM1.55 | length 18.5
  Top Layer w0.152: UM1.55 52.949,117.849 53.2,118.1 54.849,118.1 55.449,118.7 62.031,118.7 63.231,117.5 68.097,117.5 PM1.6
JTAG_TMS-SWDIO: PM1.2 UM1.46 | length 19.6
  Top Layer w0.152: UM1.46 61.25,113.85 61.7,113.4 68.9,113.4 70.4,114.9 70.4,116.5 71.391,117.491 73.168,117.491 PM1.2
LED1: RM7.1 UM1.8 | length 66.1
  Top Layer w0.152: v1(39.284,107.9) 42.5,111.116 45.016,111.116 45.25,111.35 UM1.8 ; v1(41.7,53.5) 41.75,53.45 RM7.1
  Bottom Layer w0.152: v1(39.284,107.9) 39.284,54.816 40,54.1 41.1,54.1 v1(41.7,53.5)
LED2: RM8.1 UM1.9 | length 75.5
  Top Layer w0.152: v1(40.2,107.9) 42.9,110.6 45,110.6 45.25,110.85 UM1.9 ; v1(52.1,53.9) 52.85,53.15 RM8.1
  Bottom Layer w0.152: v1(40.2,107.9) 39.7,107.4 39.7,55.2 40.4,54.5 51.4,54.5 52,53.9 v1(52.1,53.9)
LED3: RM9.1 UM1.10 | length 84.8
  Top Layer w0.152: v1(41.2,107.9) 43.4,110.1 44.9,110.1 45.15,110.35 UM1.10 ; v1(63.1,54.5) 63.95,53.65 RM9.1
  Bottom Layer w0.152: v1(41.2,107.9) 40.127,106.827 40.127,55.7 40.827,55 62.6,55 v1(63.1,54.5)
LED4: RM10.1 UM1.11 | length 94.9
  Top Layer w0.152: v1(42.2,107.9) 43.912,109.612 43.924,109.6 45.15,109.6 45.4,109.85 UM1.11 ; v1(74.2,55.5) 74.8,55.5 75.15,55.15 RM10.1
  Bottom Layer w0.152: v1(42.2,107.9) 40.6,106.3 40.6,56.5 40.6,56 41.1,55.5 v1(74.2,55.5)
LED5: RM11.1 UM1.14 | length 103
  Top Layer w0.152: v1(44.6,108.3) 46.479,108.3 UM1.14 ; v1(85.8,54.3) 86.25,53.85 RM11.1
  Bottom Layer w0.152: v1(44.6,108.3) 43.4,108.3 41.1,106 41.1,57 41.1,56.6 41.7,56 77.3,56 78.5,54.8 85.3,54.8 v1(85.8,54.3)
LED6: RM12.1 UM1.15 | length 112.5
  Top Layer w0.152: v1(45.016,107.4) 45.016,107.402 45.465,107.85 UM1.15 ; v1(97.315,54.7) 97.315,53.335 RM12.1
  Bottom Layer w0.152: v1(45.016,107.4) 43.4,107.4 41.6,105.6 41.6,57.1 42.2,56.5 77.7,56.5 78.9,55.3 96.715,55.3 v1(97.315,54.7)
Net*?_1: *?.1@138.59,76.12 RIS32.2 RIS33.1
Net*?_2: *?.2@138.59,73.58 RIS31.2 RIS32.1 RIS36.2
Net*?_6: *?.6@123.22,58.28 CIS31.1 RIS33.2 RIS34.1
Net*_1: *.1 RIS12.2 RIS13.1
Net*_2: *.2 RIS11.2 RIS12.1
Net*_6: *.6 CIS11.1 RIS13.2 RIS14.1
Net*_8: *.8 RIS22.2 RIS23.1
Net*_10: *.10 RIS21.2 RIS22.1
Net*_12: *.12 CIS21.1 RIS23.2 RIS24.1
NetCDAC1_2: CDAC1.2 ROS11.1 | length 22.4
  Top Layer w0.5: ROS11.1 78.365,74.329 78.365,75.3 79.929,76.863 79.929,78.248 80.481,78.8 94.29,78.8 96.24,80.75 CDAC1.2@96.64,80.75
NetCDAC2_2: CDAC2.2 ROS21.1 | length 14
  Top Layer w0.5: ROS21.1 91.65,75.194 91.943,75.487 92.573,75.487 93.172,76.086 93.172,77.3 93.772,77.9 98.35,77.9 101.2,80.75 CDAC2.2
NetCOS11_2: COS11.2 ROS11.2 ROS12.1 ROS13.1 | length 7.1
  Top Layer w0.5: ROS11.2 79.636,74.35 81.186,75.9 81.186,76.35 ROS13.1 ROS12.1 81.361,74.275 81.361,72.325 COS11.2
NetCOS12_1: COS12.1 ROS12.2 UOS1.2 | length 6.1
  Top Layer w0.5: ROS12.2@82.636,74.1 82.786,73.95 82.786,69.685 UOS1.2 ; ROS12.2 82.686,74.35 84.086,74.35 COS12.1
NetCOS12_2: COS12.2 COS13.1 ROS13.2 UOS1.1 | length 15.8
  Top Layer w0.5: ROS13.2 84.886,76.5 85.269,76.117 85.269,72.583 84.139,71.453 84.139,72.903 COS12.2@84.186,72.95 ; UOS1.1@84.036,69.85 86.981,69.85 87.531,69.3 COS13.1 ; UOS1.1@84.139,70.053 84.139,71.353
NetCOS13_2: COS13.2 ROS14.1 | length 3.5
  Top Layer w0.5: ROS14.1@86.836,63.5 ROS14.1 86.836,65.711 87.575,66.45 COS13.2@87.786,66.45
NetCOS14_1: COS14.1 ROS15.3 ROS16.1 UOS1.6 | length 12.4
  Top Layer w0.5: ROS16.1 79.236,59.35 79.386,59.5 79.386,60.47 79.716,60.8 v1(81.5,60.8) ; COS14.1 UOS1.6
  Bottom Layer w0.5: v1(81.5,60.8) 84.9,60.8 85.7,61.6 ROS15.3
NetCOS14_2: COS14.2 ROS17.1 UOS1.7 | length 7.6
  Top Layer w0.5: COS14.2 COS14.2 81.552,58.7 ; ROS17.1 ROS17.1 81.552,58.7 ; UOS1.7 82.821,59.335 82.186,58.7 81.552,58.7
NetCOS21_2: COS21.2 ROS21.2 ROS22.1 ROS23.1 | length 6.1
  Top Layer w0.5: ROS21.2@93.069,74.175 94.519,75.625 ; COS21.2@94.419,72.4 94.469,72.45 94.469,74.05 ROS22.1 94.519,75.625 ; ROS23.1 94.569,76.3 94.519,76.25 94.519,75.625
NetCOS22_1: COS22.1 ROS22.2 UOS2.2 | length 5.8
  Top Layer w0.5: UOS2.2 95.92,69.951 95.92,73.999 ROS22.2 COS22.1
NetCOS22_2: COS22.2 COS23.1 ROS23.2 UOS2.1 | length 15.8
  Top Layer w0.5: ROS23.2 97.969,76.3 98.569,75.7 98.569,72.5 97.43,71.361 97.28,71.511 ; COS22.2 97.28,72.689 97.28,71.511 ; COS23.1 100.969,69.3 100.419,69.85 UOS2.1 97.269,69.872 97.269,70.686 97.28,70.697 97.28,71.511
NetCOS23_2: COS23.2 ROS24.1 | length 3.7
  Top Layer w0.5: ROS24.1 100.019,65.8 100.435,66.216 100.435,66.427 100.758,66.75 COS23.2
NetCOS24_1: COS24.1 ROS25.3 ROS26.1 UOS2.6 | length 11
  Top Layer w0.5: ROS26.1 93.686,60.4 94.186,60.9 v1(95.969,60.9) 94.919,61.95 94.919,63.782 UOS2.6
  Bottom Layer w0.5: v1@95.9,61.1 96,61 97.3,61 97.8,61.5 ROS25.3
NetCOS24_2: COS24.2 ROS27.1 UOS2.7 | length 8.4
  Top Layer w0.5: ROS27.1 95.986,58.6 ; COS24.2 95.986,58.6 ; UOS2.7 96.221,63.75 96.221,62.548 97.069,61.7 97.069,59.029 96.64,58.6 95.986,58.6
NetDM1_1: DM1.1 RM7.2 | length 4.1
  Top Layer w0.5: RM7.2@40.4,52.1 40.43,52.07 DM1.1
NetDM2_1: DM2.1 RM8.2 | length 4.1
  Top Layer w0.5: DM2.1 51.553,52.053 RM8.2@51.6,52.1
NetDM3_1: DM3.1 RM9.2 | length 4.5
  Top Layer w0.5: DM3.1 62.676,52.476 RM9.2@62.7,52.5
NetDM4_1: DM4.1 RM10.2 | length 4.9
  Top Layer w0.5: DM4.1 RM10.2@73.799,52.899
NetDM5_1: DM5.1 RM11.2 | length 4.9
  Top Layer w0.5: RM11.2@84.9,52.899 84.922,52.877 DM5.1
NetDM6_1: DM6.1 RM12.2 | length 5.3
  Top Layer w0.5: RM12.2@96,53.3 96.045,53.255 DM6.1
NetDP1_2: DP1.2 PP1.1 PP1.2
NetDP2_1: DP2.1 PP1.9 PP1.10
NetJ02_2: J02.2 RD22.1 RD23.1 | length 5.3
  Top Layer w0.5: J02.2 97.34,34.075 102.575,34.075 RD22.1
NetJI1_2: JI1.2 RD32.1 RD33.1 | length 5.2
  Top Layer w0.5: JI1.2 75.094,34.125 78.2,34.125 80.175,34.125 RD32.1
NetJI2_2: JI2.2 RD42.1 RD43.1 | length 5.5
  Top Layer w0.5: JI2.2 63.971,34.075 69.375,34.075 RD42.1
NetJI3_2: JI3.2 RD52.1 RD53.1 | length 5.7
  Top Layer w0.5: JI3.2 52.848,34.125 58.475,34.125 RD52.1
NetJI4_2: JI4.2 RD62.1 RD63.1 | length 5.6
  Top Layer w0.5: JI4.2 41.725,34.125 44.9,34.125 47.245,34.125 RD62.1@47.27,34.15
NetJO1_2: JO1.2 RD12.1 RD13.1 | length 5.2
  Top Layer w0.5: JO1.2 86.217,34.125 91.375,34.125 RD12.1
NetPM1_10: PM1.10 RM13.1 RM14.1 | length 21.7
  Top Layer w0.152: RM13.1 46.75,118.85 47.074,119.174 47.124,119.174 48.25,120.3 55.65,120.3 56.75,119.2 ; RM14.1 56.75,119.2 ; PM1.10 63.794,118.54 63.134,119.2 56.75,119.2
NetRIS35_3: RIS35.3 RIS36.1
NetRIS41_2: RIS41.2 RIS42.2
NetROS14_2: ROS14.2 ROS15.2 | length 4.1
  Top Layer w0.5: ROS14.2@88.136,63.5 88.136,63.45 90.269,61.317 v1(90.269,60.3)
NetROS24_2: ROS24.2 ROS25.2 | length 3.9
  Top Layer w0.5: ROS24.2 101.319,63.55 102.669,62.2 v1(102.669,60.3)
NRESET: CM1.2 RM1.2 RM13.2 SM1.2 UM1.7 | length 21.5
  Top Layer w0.152: v1(44,118.9) 45.35,118.9 RM13.2 ; UM1.7 46.554,111.825 48.075,111.825 v1(48.1,111.8)
  Bottom Layer w0.152: v1(44,118.9) 44,118.1 45.6,116.5 46.6,116.5 47.05,116.05 ; v1(48.1,111.8) 48.1,115 47.05,116.05 ; 41.7,117.8 SM1.2 41.7,117.8 ; 41.7,117.8 CM1.2 41.75,116.05 43.45,116.05 RM1.2 47.05,116.05
OSC_IN: CM2.2 RM2.1 UM1.5 XM1.3 | length 9.6
  Top Layer w0.152: CM2.2 38.798,114.655 XM1.3 39.878,113.9 41.3,113.9 41.95,113.25 RM2.1 44.65,113.25 45.05,112.85 UM1.5
OSC_OUT: CM3.2 RM2.2 UM1.6 XM1.1 | length 10.3
  Top Layer w0.152: CM3.2 37.448,109.4 37.772,109.724 37.772,110.107 XM1.1 ; XM1.1@39.044,111.344 41.344,111.344 42,112 43.65,112 43.7,111.95 44.616,111.95 45.016,112.35 UM1.6
OUT_1: CDAC1.1 UDAC1.14 | length 14.3
  Top Layer w0.25: CDAC1.1@96.64,82.25 96.69,82.2 99.606,82.2 101.096,83.69 101.096,89.266 99.418,90.944 99.418,92.08 UDAC1.14
OUT_2: CDAC2.1 UDAC1.15 | length 10.6
  Top Layer w0.25: UDAC1.15 99.975,91.1 101.6,89.475 CDAC2.1
PITCH_CV: JI1.3 RD31.2 RIS11.1 | length 13.5
  Top Layer w0.5: JI1.3 77.169,42.6 77.844,43.275 77.844,53.675
PITCH_CV_OUT: *.7 CIS11.2 RIS14.2 UADC1.1
PITCH_CV_SWITCH: CD31.2 RD33.2 UM1.58 | length 135.5
  Top Layer w0.152: UM1.58 51.449,115.651 52.1,115 v1(52.1,113.9)
  Top Layer w0.25: 78.2,36.275 v1(78.8,36.275)
  Top Layer w0.5: RD33.2 78.2,36.275 CD31.2
  Bottom Layer w0.152: v1(52.1,113.9) 52.1,113.705 51.3,112.905 51.3,111.6 49.8,110.1 38.833,110.1 37.7,108.967 37.7,61.4 37.3,61 37.3,41.1 37.8,40.6 76.6,40.6 78.8,38.4 v1(78.8,36.275)
Pot1: RM4.1 UM1.41 | length 14.4
  Top Layer w0.152: UM1.41 59.5,111.35 59.85,111.7 63.9,111.7 v1(64,111.6)
  Bottom Layer w0.152: v1(64,111.6) 64,110.2 65.5,108.7 65.5,106.045 64.307,104.852 64.247,104.911 RM4.1@64.155,104.911
Pot2: RM4.2 UM1.42 | length 17.1
  Top Layer w0.152: UM1.42 59.433,111.85 59.7,112.117 66.133,112.117 v1(66.65,111.6)
  Bottom Layer w0.152: v1(66.65,111.6) 66.65,109.728 68,108.378 68,106.005 RM4.2
Pot3: RM4.3 UM1.43 | length 19.8
  Top Layer w0.152: UM1.43 59.4,112.35 59.65,112.6 68.2,112.6 v1(69.2,111.6)
  Bottom Layer w0.152: v1(69.2,111.6) 69.2,109.663 70.5,108.363 70.5,105.965 RM4.3
Pot4: RM4.4 UM1.44 | length 23.1
  Top Layer w0.152: UM1.44 59.274,112.85 59.5,113.076 70.904,113.076 71.8,112.18 v1(71.8,111.6)
  Bottom Layer w0.152: RM4.4 73.319,106.244 73.319,108.1 71.8,109.619 v1(71.8,111.6)
PWM_CV_OUT: *.14 CIS21.2 RIS24.2 UADC1.3
RX: PM2.2 UM1.52 | length 21.6
  Top Layer w0.152: UM1.52 54.449,108.851 56.5,106.8 60.8,106.8 61.2,106.4 65.5,106.4 66.545,107.445 PM2.2
TX: PM2.3 UM1.53 | length 24.8
  Top Layer w0.152: UM1.53 53.949,108.951 56.4,106.5 60.574,106.5 60.974,106.1 67.89,106.1 PM2.3
VCOM: CDAC3.2 UDAC1.13 | length 5.1
  Top Layer w0.25: UDAC1.13 98.705,90.505 98.932,90.277 CDAC3.2@98.932,87.1
VREF: CADC4.1 UADC1.13 UADC2.2 | length 5.2
  Top Layer w0.5: UADC1.13 40.207,89.706 40.207,92.307 CADC4.1 40.3,94.26 40.475,94.435 UADC2.2
ZERO_FLAG: UDAC1.16
pads on no net: *?.1@123.22,70.98 *?.2@123.22,68.44 *?.3@123.22,65.9 *?.4 *?.5@138.59,65.96 *?.6@138.59,63.42 *?.7@138.59,60.88 *?.8 *?.9 *?.10 *?.11 *?.12 *?.13 *?.14 J02.18 JI1.18 JI2.18 JI3.18 JI4.18 JO1.18 PM1.7 PM1.8 ROS15.1 ROS25.1 UADC1.5 UADC1.6 UDAC1.9 UDAC1.10 UM1.2 UM1.3 UM1.4 UM1.16 UM1.17 UM1.20 UM1.25 UM1.26 UM1.27 UM1.29 UM1.30 UM1.35 UM1.45 UM1.51

## Polygon pours and split planes (outlines as drawn)
DGND on Bottom Layer "DGND_L02_P101" (solid, pour order 101): 35,122.6 35,95.3 83.5,95.3 83.5,122.6
DGND on Bottom Layer "DGND_L02_P107" (solid, pour order 107): 41.932,95.3 41.885,95.253 41.885,57.7 41.9,57.7 42.7,56.9 78.2,56.9 79.36,55.74 97.36,55.74 98.8,54.3 98.8,53.2 103.5,53.2 103.6,53.1 103.6,58.6 81.9,58.6 77.9,62.6 71.2,62.6 71.2,95.3 71.3,95.4
DGND on Bottom Layer "DGND_L02_P105" (solid, pour order 105): 39.4,53.8 39.3,53.7 39.3,41.7 103.5,41.7 103.5,54.1 39.284,54.1
GND on Bottom Layer "GND_L02_P079" (solid, pour order 79): 35,137.5 103.9,137.5 104,137.4 104,122.9 35,122.9
-12 on Bottom Layer "NONET_L02_P067" (solid, shelved, pour order 67): 88.512,68.6 83.5,68.6 83.5,124.9 81.5,124.9 81.5,128.254 88.512,128.254
+12 on Bottom Layer "+12_L02_P065" (solid, pour order 65): 88.9,67.7 93.6,67.7 93.6,135.7 73.073,135.7 73.073,132.4 88.9,132.4
+12 on Bottom Layer "+12_L02_P024" (solid, pour order 24): 55.716,135.7 59.8,135.7 93.6,135.7 93.6,132.4 55.716,132.4
-12 on Bottom Layer "-12_L02_P025" (solid, pour order 25): 55.716,124.89 55.716,128.3 81.516,128.3 81.516,124.89 63.316,124.89 59.416,124.89
no net on Bottom Layer "NONET_L02_P063" (solid, pour order 63): 50.009,87.507
+12 on Bottom Layer "+12_L02_P061" (solid, pour order 61): 88.9,69.1 88.9,65.9 88.5,65.5 86.3,65.5 85.7,66.1 85.7,69.1 75.6,69.1 75.569,69.069 75.569,64.231 76.4,63.4 92.7,63.4 93.6,64.3 93.6,69.1
-12 on Bottom Layer "-12_L02_P045" (solid, pour order 45): 71.5,70 71.5,75.6 88.5,75.6 88.5,70
+12 on Bottom Layer "+12_L02_P043" (solid, pour order 43): 88.9,70.6 93.6,70.6 93.6,67.5 88.9,67.5
no net on Bottom Layer "NONET_L-01_P-001" (solid, pour order 21): 37.46,133.72
DGND on Top Layer "DGND_L01_P109" (solid, pour order 109): 35,119.8 83.5,119.8 83.5,101.4 35,101.4
AGND on Top Layer "AGND_L01_P085" (solid, pour order 85): 104,54.1 69.969,54.1 35,54.1 35,100.7 103.951,100.7
AGND on Top Layer "AGND_L01_P103" (solid, pour order 103): 103.951,100.7 103.951,120.3 83.965,120.3 83.965,100.7
GND on Top Layer "GND_L01_P077" (solid, pour order 77): 35,137.5 35,120.7 104,120.7 104,137.5
DGND on Top Layer "DGND_L01_P097" (solid, pour order 97): 99.7,37.65 101.073,37.65 101.218,37.795 101.218,41.7 99.7,41.7
DGND on Top Layer "DGND_L01_P095" (solid, pour order 95): 88.7,37.85 90.073,37.85 90.218,37.995 90.218,41.9 88.7,41.9
DGND on Top Layer "DGND_L01_P093" (solid, pour order 93): 77.5,37.85 78.873,37.85 79.018,37.995 79.018,41.9 77.5,41.9
DGND on Top Layer "DGND_L01_P091" (solid, pour order 91): 66.5,37.85 67.873,37.85 68.018,37.995 68.018,41.9 66.5,41.9
DGND on Top Layer "DGND_L01_P089" (solid, pour order 89): 55.4,37.85 56.773,37.85 56.918,37.995 56.918,41.9 55.4,41.9
DGND on Top Layer "DGND_L01_P087" (solid, pour order 87): 44.2,37.85 45.573,37.85 45.718,37.995 45.718,41.9 44.2,41.9
DGND on Top Layer "DGND_L01_P083" (solid, pour order 83): 39.5,41.5 103.5,41.5 103.5,53.8 39.5,53.8
3V3 on Top Layer "3V3_L01_P018" (solid, pour order 18): 78.8,135.697 78.8,132.141 79,131.941 79.02,131.961 81.031,131.961 81.292,131.7 81.292,126.007 81.084,125.799 74.63,125.799 74.4,126.029 74.4,131.8 74.817,132.217 76.4,132.217 76.5,132.317 76.5,135.661
AGND on Top Layer "AGND_L01_P059" (solid, pour order 59): 104.069,77.5 70.069,77.5 70.069,54 104.069,54
+12 on Top Layer "+12_L01_P075" (solid, pour order 75): 76.2,135.7 76.2,132.5 72.5,132.5 72.5,135.661
+12 on Top Layer "+12_L01_P071" (solid, pour order 71): 84.2,135.7 87.9,135.7 87.9,132.5 84.2,132.5
3V3 on Top Layer "3V3_L01_P027" (solid, pour order 27): 73.1,132.189 73.1,129 73.1,125.799 81.283,125.799 81.283,132.226
+5 on Top Layer "+5_L01_P019" (solid, pour order 19): 90.7,135.931 90.7,132.275 93.539,132.275 93.539,125.898 93.441,125.8 85.9,125.8 85.9,132.275 88.069,132.275 88.069,135.931
+12 on Top Layer "+12_L01_P057" (solid, pour order 57): 83.44,62.5 84.669,62.5 84.669,66.2 83.669,67.2 79.069,67.2 79.069,68.1 78.469,68.7 75.769,68.7 75.769,65.6 83.269,65.6 83.269,65.571 83.44,65.4
-12 on Top Layer "-12_L01_P055" (solid, pour order 55): 79.122,71.7 79.569,71.253 80.869,71.253 80.869,68.05 79.719,68.05 78.769,69 75.769,69 75.769,71.7
-12 on Top Layer "-12_L01_P053" (solid, pour order 53): 77.657,71.683 75.569,73.803 75.569,74.6 72.069,74.6 72.069,71.5 72.069,70.346 74.223,70.346 75.569,69 77.669,69
-12 on Top Layer "-12_L01_P047" (solid, pour order 47): 90.857,71.886 88.569,74.209 88.569,75.1 85.969,75.1 85.969,72.4 85.269,71.7 85.269,70.546 87.423,70.546 88.769,69.2 90.869,69.2
-12 on Top Layer "-12_L01_P037" (solid, pour order 37): 92.322,71.9 92.769,71.453 94.069,71.453 94.069,68.25 92.919,68.25 91.969,69.2 88.969,69.2 88.969,71.9